# EAGLE board 00A-80-A1-01 (EAGLE 6.3), part 1 of 2
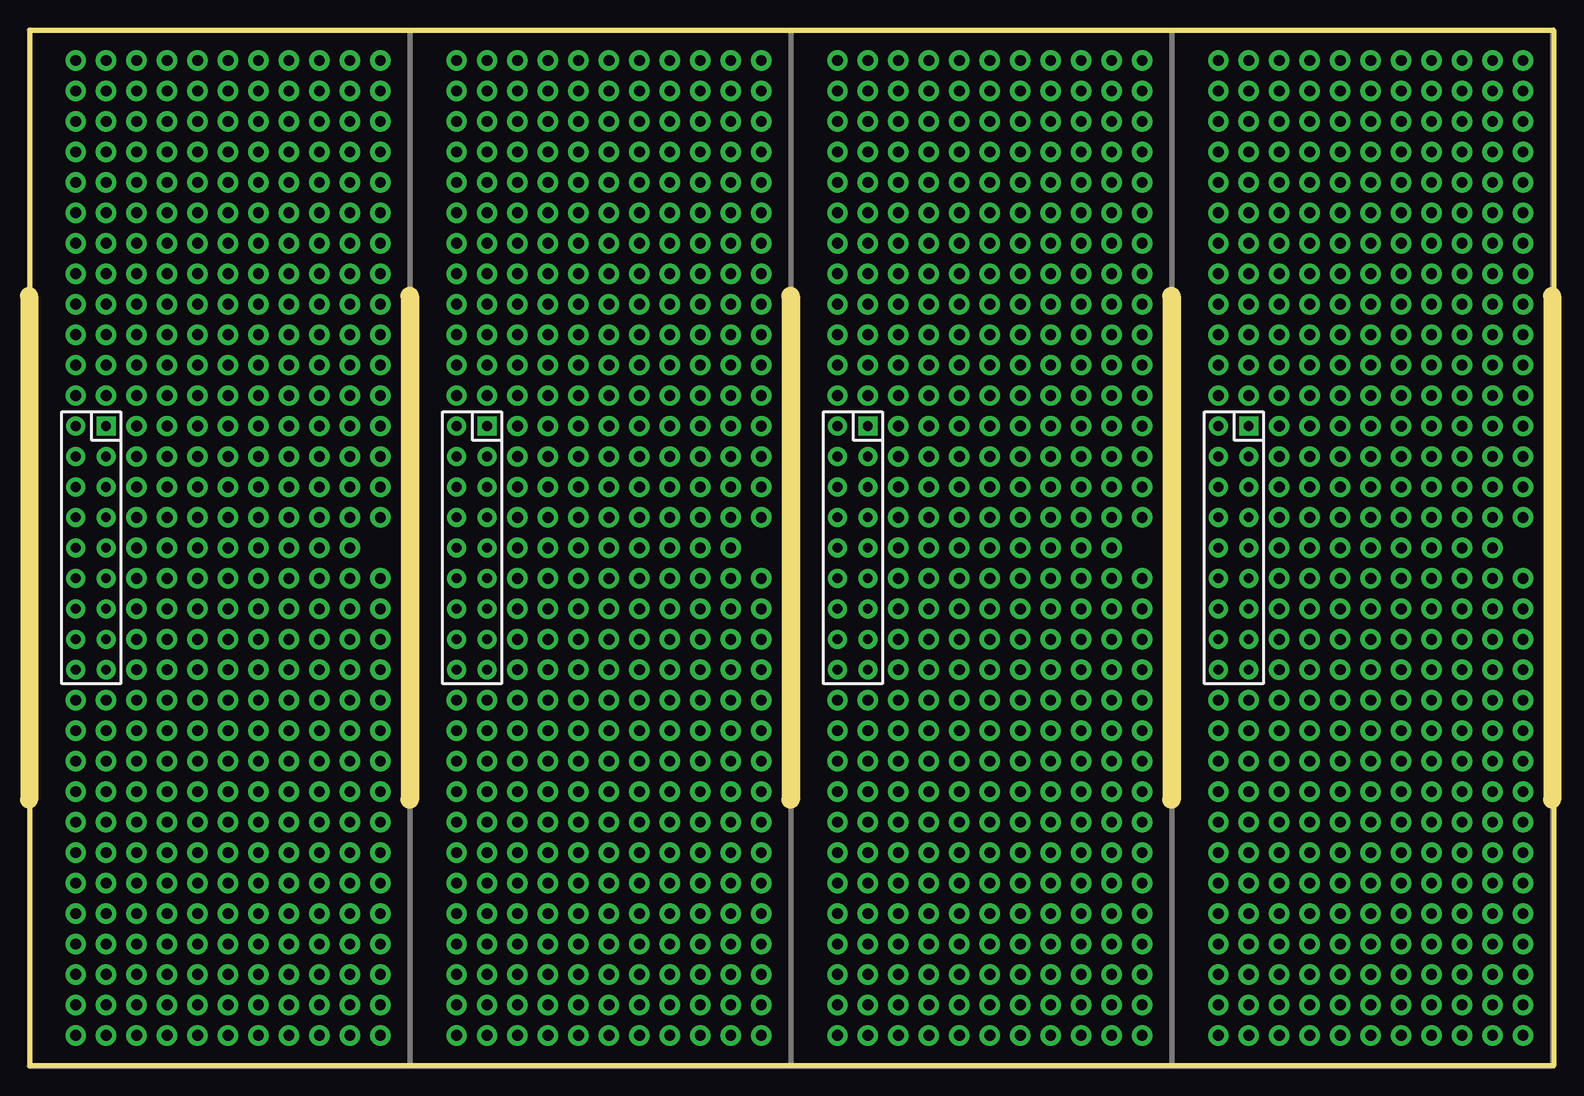
[diagram p0: board, top side]

Size 127 x 86.36 mm. Coordinates in mm from the lower left corner, seen from the top.
Outline: 0,86.36 127,86.36 127,0 0,0 0,86.36
Copper layers (1*16): Top 0.035mm / dielectric 1.5mm / Bottom 0.035mm
Design rules "minipcb-THD": minimum track width 0.5mm, minimum drill 0.5mm, track to track 0.5mm, track to pad 0.5mm, pad to pad 0.5mm, via to via 0.5mm, smd to smd 0mil, copper to edge 1mm, drill to drill 1mm, minimum pad ring 0.4mm, minimum via ring 0.4mm, stop-mask expansion 0.1mm, vias tented up to drill 0.6mm, thermal gap 0.5mm

## Footprints (pad centres in the part's own frame; a part is rotated, then mirrored left to right if it is on the bottom)
BC_HOUSING_35MM = drill 0.8 square: 1 6.42,10.16 | drill 0.8: 2 3.88,10.16; 3 6.42,7.62; 4 3.88,7.62; 5 6.42,5.08; 6 3.88,5.08; 7 6.42,2.54; 8 3.88,2.54; 9 6.42,0; 10 3.88,0; 11 6.42,-2.54; 12 3.88,-2.54; 13 6.42,-5.08; 14 3.88,-5.08; 15A 6.42,-7.62; 15B 3.88,-7.62; 16A 6.42,-10.16; 16B 3.88,-10.16

## Placement (x,y rotation side)
E$1  [IMAGE_GERBER_FRAME]  -44.45,-60.96 0 top  (outside the outline)
J1  [BC_HOUSING_35MM]  -0.07,43.18 0 top
J2  [BC_HOUSING_35MM]  31.68,43.18 0 top
J3  [BC_HOUSING_35MM]  63.43,43.18 0 top
J4  [BC_HOUSING_35MM]  95.18,43.18 0 top

## Library data of the parts
E$1 = miniPCB_ENGDWG; DWG_NO: 00A-80; REV: A1-01
J1-J4 = miniPCB_BOARDS

## Tracks (layer width: path | path; a pad name or v marks a point on that pad's centre or on a via)
N$1  (via drill 0.9)
  other vias: 3.81,60.96
N$2  (via drill 0.9)
  other vias: 3.81,58.42
N$3  (via drill 0.9)
  other vias: 6.35,58.42
N$4  (via drill 0.9)
  other vias: 6.35,60.96
N$5  (via drill 0.9)
  other vias: 8.89,60.96
N$6  (via drill 0.9)
  other vias: 8.89,58.42
N$7  (via drill 0.9)
  other vias: 3.81,55.88
N$8  (via drill 0.9)
  other vias: 6.35,55.88
N$9  (via drill 0.9)
  other vias: 8.89,55.88
N$10  (via drill 0.9)
  other vias: 8.89,53.34
N$11  (via drill 0.9)
  other vias: 8.89,50.8
N$12  (via drill 0.9)
  other vias: 8.89,48.26
N$13  (via drill 0.9)
  other vias: 8.89,45.72
N$14  (via drill 0.9)
  other vias: 8.89,43.18
N$15  (via drill 0.9)
  other vias: 8.89,40.64
N$16  (via drill 0.9)
  other vias: 8.89,38.1
N$17  (via drill 0.9)
  other vias: 8.89,35.56
N$18  (via drill 0.9)
  other vias: 8.89,33.02
N$19  (via drill 0.9)
  other vias: 8.89,30.48
N$20  (via drill 0.9)
  other vias: 6.35,30.48
N$21  (via drill 0.9)
  other vias: 3.81,30.48
N$22  (via drill 0.9)
  other vias: 3.81,27.94
N$23  (via drill 0.9)
  other vias: 6.35,27.94
N$24  (via drill 0.9)
  other vias: 8.89,27.94
N$25  (via drill 0.9)
  other vias: 3.81,25.4
N$26  (via drill 0.9)
  other vias: 6.35,25.4
N$27  (via drill 0.9)
  other vias: 8.89,25.4
N$28  (via drill 0.9)
  other vias: 8.89,22.86
N$29  (via drill 0.9)
  other vias: 6.35,22.86
N$30  (via drill 0.9)
  other vias: 3.81,22.86
N$31  (via drill 0.9)
  other vias: 11.43,22.86
N$32  (via drill 0.9)
  other vias: 11.43,25.4
N$33  (via drill 0.9)
  other vias: 11.43,27.94
N$34  (via drill 0.9)
  other vias: 11.43,30.48
N$35  (via drill 0.9)
  other vias: 11.43,33.02
N$36  (via drill 0.9)
  other vias: 11.43,35.56
N$37  (via drill 0.9)
  other vias: 11.43,38.1
N$38  (via drill 0.9)
  other vias: 11.43,40.64
N$39  (via drill 0.9)
  other vias: 11.43,43.18
N$40  (via drill 0.9)
  other vias: 11.43,45.72
N$41  (via drill 0.9)
  other vias: 11.43,48.26
N$42  (via drill 0.9)
  other vias: 11.43,50.8
N$43  (via drill 0.9)
  other vias: 11.43,53.34
N$44  (via drill 0.9)
  other vias: 11.43,55.88
N$45  (via drill 0.9)
  other vias: 11.43,58.42
N$46  (via drill 0.9)
  other vias: 11.43,60.96
N$47  (via drill 0.9)
  other vias: 11.43,63.5
N$48  (via drill 0.9)
  other vias: 8.89,63.5
N$49  (via drill 0.9)
  other vias: 6.35,63.5
N$50  (via drill 0.9)
  other vias: 3.81,63.5
N$51  (via drill 0.9)
  other vias: 13.97,60.96
N$52  (via drill 0.9)
  other vias: 13.97,58.42
N$53  (via drill 0.9)
  other vias: 13.97,55.88
N$54  (via drill 0.9)
  other vias: 13.97,53.34
N$55  (via drill 0.9)
  other vias: 13.97,50.8
N$56  (via drill 0.9)
  other vias: 13.97,48.26
N$57  (via drill 0.9)
  other vias: 13.97,45.72
N$58  (via drill 0.9)
  other vias: 13.97,43.18
N$59  (via drill 0.9)
  other vias: 13.97,40.64
N$60  (via drill 0.9)
  other vias: 13.97,38.1
N$61  (via drill 0.9)
  other vias: 13.97,35.56
N$62  (via drill 0.9)
  other vias: 13.97,33.02
N$63  (via drill 0.9)
  other vias: 13.97,30.48
N$64  (via drill 0.9)
  other vias: 13.97,27.94
N$65  (via drill 0.9)
  other vias: 13.97,25.4
N$66  (via drill 0.9)
  other vias: 13.97,22.86
N$67  (via drill 0.9)
  other vias: 16.51,22.86
N$68  (via drill 0.9)
  other vias: 16.51,25.4
N$69  (via drill 0.9)
  other vias: 16.51,27.94
N$70  (via drill 0.9)
  other vias: 16.51,30.48
N$71  (via drill 0.9)
  other vias: 16.51,33.02
N$72  (via drill 0.9)
  other vias: 16.51,35.56
N$73  (via drill 0.9)
  other vias: 16.51,38.1
N$74  (via drill 0.9)
  other vias: 16.51,40.64
N$75  (via drill 0.9)
  other vias: 16.51,43.18
N$76  (via drill 0.9)
  other vias: 16.51,45.72
N$77  (via drill 0.9)
  other vias: 16.51,48.26
N$78  (via drill 0.9)
  other vias: 16.51,50.8
N$79  (via drill 0.9)
  other vias: 16.51,53.34
N$80  (via drill 0.9)
  other vias: 16.51,55.88
N$81  (via drill 0.9)
  other vias: 16.51,58.42
N$82  (via drill 0.9)
  other vias: 16.51,60.96
N$83  (via drill 0.9)
  other vias: 16.51,63.5
N$84  (via drill 0.9)
  other vias: 13.97,63.5
N$85  (via drill 0.9)
  other vias: 19.05,60.96
N$86  (via drill 0.9)
  other vias: 19.05,58.42
N$87  (via drill 0.9)
  other vias: 19.05,55.88
N$88  (via drill 0.9)
  other vias: 19.05,53.34
N$89  (via drill 0.9)
  other vias: 19.05,50.8
N$90  (via drill 0.9)
  other vias: 19.05,48.26
N$91  (via drill 0.9)
  other vias: 19.05,45.72
N$92  (via drill 0.9)
  other vias: 19.05,43.18
N$93  (via drill 0.9)
  other vias: 19.05,40.64
N$94  (via drill 0.9)
  other vias: 19.05,38.1
N$95  (via drill 0.9)
  other vias: 19.05,35.56
N$96  (via drill 0.9)
  other vias: 19.05,33.02
N$97  (via drill 0.9)
  other vias: 19.05,30.48
N$98  (via drill 0.9)
  other vias: 19.05,27.94
N$99  (via drill 0.9)
  other vias: 19.05,25.4
N$100  (via drill 0.9)
  other vias: 19.05,22.86
N$101  (via drill 0.9)
  other vias: 21.59,22.86
N$102  (via drill 0.9)
  other vias: 21.59,25.4
N$103  (via drill 0.9)
  other vias: 21.59,27.94
N$104  (via drill 0.9)
  other vias: 21.59,30.48
N$105  (via drill 0.9)
  other vias: 21.59,33.02
N$106  (via drill 0.9)
  other vias: 21.59,35.56
N$107  (via drill 0.9)
  other vias: 21.59,38.1
N$108  (via drill 0.9)
  other vias: 21.59,40.64
N$109  (via drill 0.9)
  other vias: 21.59,43.18
N$110  (via drill 0.9)
  other vias: 21.59,45.72
N$111  (via drill 0.9)
  other vias: 21.59,48.26
N$112  (via drill 0.9)
  other vias: 21.59,50.8
N$113  (via drill 0.9)
  other vias: 21.59,53.34
N$114  (via drill 0.9)
  other vias: 21.59,55.88
N$115  (via drill 0.9)
  other vias: 21.59,58.42
N$116  (via drill 0.9)
  other vias: 21.59,60.96
N$117  (via drill 0.9)
  other vias: 21.59,63.5
N$118  (via drill 0.9)
  other vias: 19.05,63.5
N$119  (via drill 0.9)
  other vias: 24.13,60.96
N$120  (via drill 0.9)
  other vias: 24.13,58.42
N$121  (via drill 0.9)
  other vias: 24.13,55.88
N$122  (via drill 0.9)
  other vias: 24.13,53.34
N$123  (via drill 0.9)
  other vias: 24.13,50.8
N$124  (via drill 0.9)
  other vias: 24.13,48.26
N$125  (via drill 0.9)
  other vias: 24.13,45.72
N$126  (via drill 0.9)
  other vias: 24.13,43.18
N$127  (via drill 0.9)
  other vias: 24.13,40.64
N$128  (via drill 0.9)
  other vias: 24.13,38.1
N$129  (via drill 0.9)
  other vias: 24.13,35.56
N$130  (via drill 0.9)
  other vias: 24.13,33.02
N$131  (via drill 0.9)
  other vias: 24.13,30.48
N$132  (via drill 0.9)
  other vias: 24.13,27.94
N$133  (via drill 0.9)
  other vias: 24.13,25.4
N$134  (via drill 0.9)
  other vias: 24.13,22.86
N$135  (via drill 0.9)
  other vias: 26.67,22.86
N$136  (via drill 0.9)
  other vias: 26.67,25.4
N$137  (via drill 0.9)
  other vias: 26.67,27.94
N$138  (via drill 0.9)
  other vias: 26.67,30.48
N$139  (via drill 0.9)
  other vias: 26.67,33.02
N$140  (via drill 0.9)
  other vias: 26.67,35.56
N$141  (via drill 0.9)
  other vias: 26.67,38.1
N$142  (via drill 0.9)
  other vias: 26.67,40.64
N$143  (via drill 0.9)
  other vias: 26.67,43.18
N$144  (via drill 0.9)
  other vias: 26.67,45.72
N$145  (via drill 0.9)
  other vias: 26.67,48.26
N$146  (via drill 0.9)
  other vias: 26.67,50.8
N$147  (via drill 0.9)
  other vias: 26.67,53.34
N$148  (via drill 0.9)
  other vias: 26.67,55.88
N$149  (via drill 0.9)
  other vias: 26.67,58.42
N$150  (via drill 0.9)
  other vias: 26.67,60.96
N$151  (via drill 0.9)
  other vias: 26.67,63.5
N$152  (via drill 0.9)
  other vias: 24.13,63.5
N$153  (via drill 0.9)
  other vias: 29.21,22.86
N$154  (via drill 0.9)
  other vias: 29.21,25.4
N$155  (via drill 0.9)
  other vias: 29.21,27.94
N$156  (via drill 0.9)
  other vias: 29.21,30.48
N$157  (via drill 0.9)
  other vias: 29.21,33.02
N$158  (via drill 0.9)
  other vias: 29.21,35.56
N$159  (via drill 0.9)
  other vias: 29.21,38.1
N$160  (via drill 0.9)
  other vias: 29.21,40.64
N$161  (via drill 0.9)
  other vias: 3.81,71.12
N$162  (via drill 0.9)
  other vias: 29.21,45.72
N$163  (via drill 0.9)
  other vias: 29.21,48.26
N$164  (via drill 0.9)
  other vias: 29.21,50.8
N$165  (via drill 0.9)
  other vias: 29.21,53.34
N$166  (via drill 0.9)
  other vias: 29.21,55.88
N$167  (via drill 0.9)
  other vias: 29.21,58.42
N$168  (via drill 0.9)
  other vias: 29.21,60.96
N$169  (via drill 0.9)
  other vias: 29.21,63.5
N$170  (via drill 0.9)
  other vias: 3.81,68.58
N$171  (via drill 0.9)
  other vias: 6.35,68.58
N$172  (via drill 0.9)
  other vias: 6.35,71.12
N$173  (via drill 0.9)
  other vias: 8.89,71.12
N$174  (via drill 0.9)
  other vias: 8.89,68.58
N$175  (via drill 0.9)
  other vias: 3.81,66.04
N$176  (via drill 0.9)
  other vias: 6.35,66.04
N$177  (via drill 0.9)
  other vias: 8.89,66.04
N$178  (via drill 0.9)
  other vias: 11.43,66.04
N$179  (via drill 0.9)
  other vias: 11.43,68.58
N$180  (via drill 0.9)
  other vias: 11.43,71.12
N$181  (via drill 0.9)
  other vias: 11.43,73.66
N$182  (via drill 0.9)
  other vias: 8.89,73.66
N$183  (via drill 0.9)
  other vias: 6.35,73.66
N$184  (via drill 0.9)
  other vias: 3.81,73.66
N$185  (via drill 0.9)
  other vias: 13.97,71.12
N$186  (via drill 0.9)
  other vias: 13.97,68.58
N$187  (via drill 0.9)
  other vias: 13.97,66.04
N$188  (via drill 0.9)
  other vias: 16.51,66.04
N$189  (via drill 0.9)
  other vias: 16.51,68.58
N$190  (via drill 0.9)
  other vias: 16.51,71.12
N$191  (via drill 0.9)
  other vias: 16.51,73.66
N$192  (via drill 0.9)
  other vias: 13.97,73.66
N$193  (via drill 0.9)
  other vias: 19.05,71.12
N$194  (via drill 0.9)
  other vias: 19.05,68.58
N$195  (via drill 0.9)
  other vias: 19.05,66.04
N$196  (via drill 0.9)
  other vias: 21.59,66.04
N$197  (via drill 0.9)
  other vias: 21.59,68.58
N$198  (via drill 0.9)
  other vias: 21.59,71.12
N$199  (via drill 0.9)
  other vias: 21.59,73.66
N$200  (via drill 0.9)
  other vias: 19.05,73.66
N$201  (via drill 0.9)
  other vias: 24.13,71.12
N$202  (via drill 0.9)
  other vias: 24.13,68.58
N$203  (via drill 0.9)
  other vias: 24.13,66.04
N$204  (via drill 0.9)
  other vias: 26.67,66.04
N$205  (via drill 0.9)
  other vias: 26.67,68.58
N$206  (via drill 0.9)
  other vias: 26.67,71.12
N$207  (via drill 0.9)
  other vias: 26.67,73.66
N$208  (via drill 0.9)
  other vias: 24.13,73.66
N$209  (via drill 0.9)
  other vias: 29.21,66.04
N$210  (via drill 0.9)
  other vias: 29.21,68.58
N$211  (via drill 0.9)
  other vias: 29.21,71.12
N$212  (via drill 0.9)
  other vias: 29.21,73.66
N$213  (via drill 0.9)
  other vias: 3.81,17.78
N$214  (via drill 0.9)
  other vias: 3.81,15.24
N$215  (via drill 0.9)
  other vias: 6.35,15.24
N$216  (via drill 0.9)
  other vias: 6.35,17.78
N$217  (via drill 0.9)
  other vias: 8.89,17.78
N$218  (via drill 0.9)
  other vias: 8.89,15.24
N$219  (via drill 0.9)
  other vias: 3.81,12.7
N$220  (via drill 0.9)
  other vias: 6.35,12.7
N$221  (via drill 0.9)
  other vias: 8.89,12.7
N$222  (via drill 0.9)
  other vias: 11.43,12.7
N$223  (via drill 0.9)
  other vias: 11.43,15.24
N$224  (via drill 0.9)
  other vias: 11.43,17.78
N$225  (via drill 0.9)
  other vias: 11.43,20.32
N$226  (via drill 0.9)
  other vias: 8.89,20.32
N$227  (via drill 0.9)
  other vias: 6.35,20.32
N$228  (via drill 0.9)
  other vias: 3.81,20.32
N$229  (via drill 0.9)
  other vias: 13.97,17.78
N$230  (via drill 0.9)
  other vias: 13.97,15.24
N$231  (via drill 0.9)
  other vias: 13.97,12.7
N$232  (via drill 0.9)
  other vias: 16.51,12.7
N$233  (via drill 0.9)
  other vias: 16.51,15.24
N$234  (via drill 0.9)
  other vias: 16.51,17.78
N$235  (via drill 0.9)
  other vias: 16.51,20.32
N$236  (via drill 0.9)
  other vias: 13.97,20.32
N$237  (via drill 0.9)
  other vias: 19.05,17.78
N$238  (via drill 0.9)
  other vias: 19.05,15.24
N$239  (via drill 0.9)
  other vias: 19.05,12.7
N$240  (via drill 0.9)
  other vias: 21.59,12.7
N$241  (via drill 0.9)
  other vias: 21.59,15.24
N$242  (via drill 0.9)
  other vias: 21.59,17.78
N$243  (via drill 0.9)
  other vias: 21.59,20.32
N$244  (via drill 0.9)
  other vias: 19.05,20.32
N$245  (via drill 0.9)
  other vias: 24.13,17.78
N$246  (via drill 0.9)
  other vias: 24.13,15.24
N$247  (via drill 0.9)
  other vias: 24.13,12.7
N$248  (via drill 0.9)
  other vias: 26.67,12.7
N$249  (via drill 0.9)
  other vias: 26.67,15.24
N$250  (via drill 0.9)
  other vias: 26.67,17.78
N$251  (via drill 0.9)
  other vias: 26.67,20.32
N$252  (via drill 0.9)
  other vias: 24.13,20.32
N$253  (via drill 0.9)
  other vias: 29.21,12.7
N$254  (via drill 0.9)
  other vias: 29.21,15.24
N$255  (via drill 0.9)
  other vias: 29.21,17.78
N$256  (via drill 0.9)
  other vias: 29.21,20.32
N$257  (via drill 0.9)
  other vias: 3.81,7.62
N$258  (via drill 0.9)
  other vias: 3.81,5.08
N$259  (via drill 0.9)
  other vias: 6.35,5.08
N$260  (via drill 0.9)
  other vias: 6.35,7.62
N$261  (via drill 0.9)
  other vias: 8.89,7.62
N$262  (via drill 0.9)
  other vias: 8.89,5.08
N$263  (via drill 0.9)
  other vias: 3.81,2.54
N$264  (via drill 0.9)
  other vias: 6.35,2.54
N$265  (via drill 0.9)
  other vias: 8.89,2.54
N$266  (via drill 0.9)
  other vias: 11.43,2.54
N$267  (via drill 0.9)
  other vias: 11.43,5.08
N$268  (via drill 0.9)
  other vias: 11.43,7.62
N$269  (via drill 0.9)
  other vias: 11.43,10.16
N$270  (via drill 0.9)
  other vias: 8.89,10.16
N$271  (via drill 0.9)
  other vias: 6.35,10.16
N$272  (via drill 0.9)
  other vias: 3.81,10.16
N$273  (via drill 0.9)
  other vias: 13.97,7.62
N$274  (via drill 0.9)
  other vias: 13.97,5.08
N$275  (via drill 0.9)
  other vias: 13.97,2.54
N$276  (via drill 0.9)
  other vias: 16.51,2.54
N$277  (via drill 0.9)
  other vias: 16.51,5.08
N$278  (via drill 0.9)
  other vias: 16.51,7.62
N$279  (via drill 0.9)
  other vias: 16.51,10.16
N$280  (via drill 0.9)
  other vias: 13.97,10.16
N$281  (via drill 0.9)
  other vias: 19.05,7.62
N$282  (via drill 0.9)
  other vias: 19.05,5.08
N$283  (via drill 0.9)
  other vias: 19.05,2.54
N$284  (via drill 0.9)
  other vias: 21.59,2.54
N$285  (via drill 0.9)
  other vias: 21.59,5.08
N$286  (via drill 0.9)
  other vias: 21.59,7.62
N$287  (via drill 0.9)
  other vias: 21.59,10.16
N$288  (via drill 0.9)
  other vias: 19.05,10.16
N$289  (via drill 0.9)
  other vias: 24.13,7.62
N$290  (via drill 0.9)
  other vias: 24.13,5.08
N$291  (via drill 0.9)
  other vias: 24.13,2.54
N$292  (via drill 0.9)
  other vias: 26.67,2.54
N$293  (via drill 0.9)
  other vias: 26.67,5.08
N$294  (via drill 0.9)
  other vias: 26.67,7.62
N$295  (via drill 0.9)
  other vias: 26.67,10.16
N$296  (via drill 0.9)
  other vias: 24.13,10.16
N$297  (via drill 0.9)
  other vias: 29.21,2.54
N$298  (via drill 0.9)
  other vias: 29.21,5.08
N$299  (via drill 0.9)
  other vias: 29.21,7.62
N$300  (via drill 0.9)
  other vias: 29.21,10.16
N$301  (via drill 0.9)
  other vias: 3.81,81.28
N$302  (via drill 0.9)
  other vias: 3.81,78.74
N$303  (via drill 0.9)
  other vias: 6.35,78.74
N$304  (via drill 0.9)
  other vias: 6.35,81.28
N$305  (via drill 0.9)
  other vias: 8.89,81.28
N$306  (via drill 0.9)
  other vias: 8.89,78.74
N$307  (via drill 0.9)
  other vias: 3.81,76.2
N$308  (via drill 0.9)
  other vias: 6.35,76.2
N$309  (via drill 0.9)
  other vias: 8.89,76.2
N$310  (via drill 0.9)
  other vias: 11.43,76.2
N$311  (via drill 0.9)
  other vias: 11.43,78.74
N$312  (via drill 0.9)
  other vias: 11.43,81.28
N$313  (via drill 0.9)
  other vias: 11.43,83.82
N$314  (via drill 0.9)
  other vias: 8.89,83.82
N$315  (via drill 0.9)
  other vias: 6.35,83.82
N$316  (via drill 0.9)
  other vias: 3.81,83.82
N$317  (via drill 0.9)
  other vias: 13.97,81.28
N$318  (via drill 0.9)
  other vias: 13.97,78.74
N$319  (via drill 0.9)
  other vias: 13.97,76.2
N$320  (via drill 0.9)
  other vias: 16.51,76.2
N$321  (via drill 0.9)
  other vias: 16.51,78.74
N$322  (via drill 0.9)
  other vias: 16.51,81.28
N$323  (via drill 0.9)
  other vias: 16.51,83.82
N$324  (via drill 0.9)
  other vias: 13.97,83.82
N$325  (via drill 0.9)
  other vias: 19.05,81.28
N$326  (via drill 0.9)
  other vias: 19.05,78.74
N$327  (via drill 0.9)
  other vias: 19.05,76.2
N$328  (via drill 0.9)
  other vias: 21.59,76.2
N$329  (via drill 0.9)
  other vias: 21.59,78.74
N$330  (via drill 0.9)
  other vias: 21.59,81.28
N$331  (via drill 0.9)
  other vias: 21.59,83.82
N$332  (via drill 0.9)
  other vias: 19.05,83.82
N$333  (via drill 0.9)
  other vias: 24.13,81.28
N$334  (via drill 0.9)
  other vias: 24.13,78.74
N$335  (via drill 0.9)
  other vias: 24.13,76.2
N$336  (via drill 0.9)
  other vias: 26.67,76.2
N$337  (via drill 0.9)
  other vias: 26.67,78.74
N$338  (via drill 0.9)
  other vias: 26.67,81.28
N$339  (via drill 0.9)
  other vias: 26.67,83.82
N$340  (via drill 0.9)
  other vias: 24.13,83.82
N$341  (via drill 0.9)
  other vias: 29.21,76.2
N$342  (via drill 0.9)
  other vias: 29.21,78.74
N$343  (via drill 0.9)
  other vias: 29.21,81.28
N$344  (via drill 0.9)
  other vias: 29.21,83.82
N$345  (via drill 0.9)
  other vias: 35.56,60.96
N$346  (via drill 0.9)
  other vias: 35.56,58.42
N$347  (via drill 0.9)
  other vias: 38.1,58.42
N$348  (via drill 0.9)
  other vias: 38.1,60.96
N$349  (via drill 0.9)
  other vias: 40.64,60.96
N$350  (via drill 0.9)
  other vias: 40.64,58.42
N$351  (via drill 0.9)
  other vias: 35.56,55.88
N$352  (via drill 0.9)
  other vias: 38.1,55.88
N$353  (via drill 0.9)
  other vias: 40.64,55.88
N$354  (via drill 0.9)
  other vias: 40.64,53.34
N$355  (via drill 0.9)
  other vias: 40.64,50.8
N$356  (via drill 0.9)
  other vias: 40.64,48.26
N$357  (via drill 0.9)
  other vias: 40.64,45.72
N$358  (via drill 0.9)
  other vias: 40.64,43.18
N$359  (via drill 0.9)
  other vias: 40.64,40.64
N$360  (via drill 0.9)
  other vias: 40.64,38.1
N$361  (via drill 0.9)
  other vias: 40.64,35.56
N$362  (via drill 0.9)
  other vias: 40.64,33.02
N$363  (via drill 0.9)
  other vias: 40.64,30.48
N$364  (via drill 0.9)
  other vias: 38.1,30.48
N$365  (via drill 0.9)
  other vias: 35.56,30.48
N$366  (via drill 0.9)
  other vias: 35.56,27.94
N$367  (via drill 0.9)
  other vias: 38.1,27.94
N$368  (via drill 0.9)
  other vias: 40.64,27.94
N$369  (via drill 0.9)
  other vias: 35.56,25.4
N$370  (via drill 0.9)
  other vias: 38.1,25.4
N$371  (via drill 0.9)
  other vias: 40.64,25.4
N$372  (via drill 0.9)
  other vias: 40.64,22.86
N$373  (via drill 0.9)
  other vias: 38.1,22.86
N$374  (via drill 0.9)
  other vias: 35.56,22.86
N$375  (via drill 0.9)
  other vias: 43.18,22.86
N$376  (via drill 0.9)
  other vias: 43.18,25.4
N$377  (via drill 0.9)
  other vias: 43.18,27.94
N$378  (via drill 0.9)
  other vias: 43.18,30.48
N$379  (via drill 0.9)
  other vias: 43.18,33.02
N$380  (via drill 0.9)
  other vias: 43.18,35.56
N$381  (via drill 0.9)
  other vias: 43.18,38.1
N$382  (via drill 0.9)
  other vias: 43.18,40.64
N$383  (via drill 0.9)
  other vias: 43.18,43.18
N$384  (via drill 0.9)
  other vias: 43.18,45.72
N$385  (via drill 0.9)
  other vias: 43.18,48.26
N$386  (via drill 0.9)
  other vias: 43.18,50.8
N$387  (via drill 0.9)
  other vias: 43.18,53.34
N$388  (via drill 0.9)
  other vias: 43.18,55.88
N$389  (via drill 0.9)
  other vias: 43.18,58.42
N$390  (via drill 0.9)
  other vias: 43.18,60.96
N$391  (via drill 0.9)
  other vias: 43.18,63.5
N$392  (via drill 0.9)
  other vias: 40.64,63.5
N$393  (via drill 0.9)
  other vias: 38.1,63.5
N$394  (via drill 0.9)
  other vias: 35.56,63.5
N$395  (via drill 0.9)
  other vias: 45.72,60.96
N$396  (via drill 0.9)
  other vias: 45.72,58.42
N$397  (via drill 0.9)
  other vias: 45.72,55.88
N$398  (via drill 0.9)
  other vias: 45.72,53.34
N$399  (via drill 0.9)
  other vias: 45.72,50.8
N$400  (via drill 0.9)
  other vias: 45.72,48.26
N$401  (via drill 0.9)
  other vias: 45.72,45.72
N$402  (via drill 0.9)
  other vias: 45.72,43.18
N$403  (via drill 0.9)
  other vias: 45.72,40.64
N$404  (via drill 0.9)
  other vias: 45.72,38.1
N$405  (via drill 0.9)
  other vias: 45.72,35.56
N$406  (via drill 0.9)
  other vias: 45.72,33.02
N$407  (via drill 0.9)
  other vias: 45.72,30.48
N$408  (via drill 0.9)
  other vias: 45.72,27.94
N$409  (via drill 0.9)
  other vias: 45.72,25.4
N$410  (via drill 0.9)
  other vias: 45.72,22.86
N$411  (via drill 0.9)
  other vias: 48.26,22.86
N$412  (via drill 0.9)
  other vias: 48.26,25.4
N$413  (via drill 0.9)
  other vias: 48.26,27.94
N$414  (via drill 0.9)
  other vias: 48.26,30.48
N$415  (via drill 0.9)
  other vias: 48.26,33.02
N$416  (via drill 0.9)
  other vias: 48.26,35.56
N$417  (via drill 0.9)
  other vias: 48.26,38.1
N$418  (via drill 0.9)
  other vias: 48.26,40.64
N$419  (via drill 0.9)
  other vias: 48.26,43.18
N$420  (via drill 0.9)
  other vias: 48.26,45.72
N$421  (via drill 0.9)
  other vias: 48.26,48.26
N$422  (via drill 0.9)
  other vias: 48.26,50.8
N$423  (via drill 0.9)
  other vias: 48.26,53.34
N$424  (via drill 0.9)
  other vias: 48.26,55.88
N$425  (via drill 0.9)
  other vias: 48.26,58.42
N$426  (via drill 0.9)
  other vias: 48.26,60.96
N$427  (via drill 0.9)
  other vias: 48.26,63.5
N$428  (via drill 0.9)
  other vias: 45.72,63.5
N$429  (via drill 0.9)
  other vias: 50.8,60.96
N$430  (via drill 0.9)
  other vias: 50.8,58.42
N$431  (via drill 0.9)
  other vias: 50.8,55.88
N$432  (via drill 0.9)
  other vias: 50.8,53.34
N$433  (via drill 0.9)
  other vias: 50.8,50.8
N$434  (via drill 0.9)
  other vias: 50.8,48.26
N$435  (via drill 0.9)
  other vias: 50.8,45.72
N$436  (via drill 0.9)
  other vias: 50.8,43.18
N$437  (via drill 0.9)
  other vias: 50.8,40.64
N$438  (via drill 0.9)
  other vias: 50.8,38.1
N$439  (via drill 0.9)
  other vias: 50.8,35.56
N$440  (via drill 0.9)
  other vias: 50.8,33.02
N$441  (via drill 0.9)
  other vias: 50.8,30.48
N$442  (via drill 0.9)
  other vias: 50.8,27.94
N$443  (via drill 0.9)
  other vias: 50.8,25.4
N$444  (via drill 0.9)
  other vias: 50.8,22.86
N$445  (via drill 0.9)
  other vias: 53.34,22.86
N$446  (via drill 0.9)
  other vias: 53.34,25.4
N$447  (via drill 0.9)
  other vias: 53.34,27.94
N$448  (via drill 0.9)
  other vias: 53.34,30.48
N$449  (via drill 0.9)
  other vias: 53.34,33.02
N$450  (via drill 0.9)
  other vias: 53.34,35.56
N$451  (via drill 0.9)
  other vias: 53.34,38.1
N$452  (via drill 0.9)
  other vias: 53.34,40.64
N$453  (via drill 0.9)
  other vias: 53.34,43.18
N$454  (via drill 0.9)
  other vias: 53.34,45.72
N$455  (via drill 0.9)
  other vias: 53.34,48.26
N$456  (via drill 0.9)
  other vias: 53.34,50.8
N$457  (via drill 0.9)
  other vias: 53.34,53.34
N$458  (via drill 0.9)
  other vias: 53.34,55.88
N$459  (via drill 0.9)
  other vias: 53.34,58.42
N$460  (via drill 0.9)
  other vias: 53.34,60.96
N$461  (via drill 0.9)
  other vias: 53.34,63.5
N$462  (via drill 0.9)
  other vias: 50.8,63.5
N$463  (via drill 0.9)
  other vias: 55.88,60.96
N$464  (via drill 0.9)
  other vias: 55.88,58.42
N$465  (via drill 0.9)
  other vias: 55.88,55.88
N$466  (via drill 0.9)
  other vias: 55.88,53.34
N$467  (via drill 0.9)
  other vias: 55.88,50.8
N$468  (via drill 0.9)
  other vias: 55.88,48.26
N$469  (via drill 0.9)
  other vias: 55.88,45.72
N$470  (via drill 0.9)
  other vias: 55.88,43.18
N$471  (via drill 0.9)
  other vias: 55.88,40.64
N$472  (via drill 0.9)
  other vias: 55.88,38.1
N$473  (via drill 0.9)
  other vias: 55.88,35.56
N$474  (via drill 0.9)
  other vias: 55.88,33.02
N$475  (via drill 0.9)
  other vias: 55.88,30.48
N$476  (via drill 0.9)
  other vias: 55.88,27.94
N$477  (via drill 0.9)
  other vias: 55.88,25.4
N$478  (via drill 0.9)
  other vias: 55.88,22.86
N$479  (via drill 0.9)
  other vias: 58.42,22.86
N$480  (via drill 0.9)
  other vias: 58.42,25.4
N$481  (via drill 0.9)
  other vias: 58.42,27.94
N$482  (via drill 0.9)
  other vias: 58.42,30.48
N$483  (via drill 0.9)
  other vias: 58.42,33.02
N$484  (via drill 0.9)
  other vias: 58.42,35.56
N$485  (via drill 0.9)
  other vias: 58.42,38.1
N$486  (via drill 0.9)
  other vias: 58.42,40.64
N$487  (via drill 0.9)
  other vias: 58.42,43.18
N$488  (via drill 0.9)
  other vias: 58.42,45.72
N$489  (via drill 0.9)
  other vias: 58.42,48.26
N$490  (via drill 0.9)
  other vias: 58.42,50.8
N$491  (via drill 0.9)
  other vias: 58.42,53.34
N$492  (via drill 0.9)
  other vias: 58.42,55.88
N$493  (via drill 0.9)
  other vias: 58.42,58.42
N$494  (via drill 0.9)
  other vias: 58.42,60.96
N$495  (via drill 0.9)
  other vias: 58.42,63.5
N$496  (via drill 0.9)
  other vias: 55.88,63.5
N$497  (via drill 0.9)
  other vias: 60.96,22.86
N$498  (via drill 0.9)
  other vias: 60.96,25.4
N$499  (via drill 0.9)
  other vias: 60.96,27.94
N$500  (via drill 0.9)
  other vias: 60.96,30.48
N$501  (via drill 0.9)
  other vias: 60.96,33.02
N$502  (via drill 0.9)
  other vias: 60.96,35.56
N$503  (via drill 0.9)
  other vias: 60.96,38.1
N$504  (via drill 0.9)
  other vias: 60.96,40.64
N$505  (via drill 0.9)
  other vias: 60.96,45.72
N$506  (via drill 0.9)
  other vias: 60.96,48.26
N$507  (via drill 0.9)
  other vias: 60.96,50.8
N$508  (via drill 0.9)
  other vias: 60.96,53.34
N$509  (via drill 0.9)
  other vias: 60.96,55.88
N$510  (via drill 0.9)
  other vias: 60.96,58.42
N$511  (via drill 0.9)
  other vias: 60.96,60.96
N$512  (via drill 0.9)
  other vias: 60.96,63.5
N$513  (via drill 0.9)
  other vias: 35.56,71.12
N$514  (via drill 0.9)
  other vias: 35.56,68.58
N$515  (via drill 0.9)
  other vias: 38.1,68.58
N$516  (via drill 0.9)
  other vias: 38.1,71.12
N$517  (via drill 0.9)
  other vias: 40.64,71.12
N$518  (via drill 0.9)
  other vias: 40.64,68.58
N$519  (via drill 0.9)
  other vias: 35.56,66.04
N$520  (via drill 0.9)
  other vias: 38.1,66.04
N$521  (via drill 0.9)
  other vias: 40.64,66.04
N$522  (via drill 0.9)
  other vias: 43.18,66.04
N$523  (via drill 0.9)
  other vias: 43.18,68.58
N$524  (via drill 0.9)
  other vias: 43.18,71.12
N$525  (via drill 0.9)
  other vias: 43.18,73.66
N$526  (via drill 0.9)
  other vias: 40.64,73.66
N$527  (via drill 0.9)
  other vias: 38.1,73.66
N$528  (via drill 0.9)
  other vias: 35.56,73.66
N$529  (via drill 0.9)
  other vias: 45.72,71.12
N$530  (via drill 0.9)
  other vias: 45.72,68.58
N$531  (via drill 0.9)
  other vias: 45.72,66.04
N$532  (via drill 0.9)
  other vias: 48.26,66.04
N$533  (via drill 0.9)
  other vias: 48.26,68.58
N$534  (via drill 0.9)
  other vias: 48.26,71.12
N$535  (via drill 0.9)
  other vias: 48.26,73.66
N$536  (via drill 0.9)
  other vias: 45.72,73.66
N$537  (via drill 0.9)
  other vias: 50.8,71.12
N$538  (via drill 0.9)
  other vias: 50.8,68.58
N$539  (via drill 0.9)
  other vias: 50.8,66.04
N$540  (via drill 0.9)
  other vias: 53.34,66.04
N$541  (via drill 0.9)
  other vias: 53.34,68.58
N$542  (via drill 0.9)
  other vias: 53.34,71.12
N$543  (via drill 0.9)
  other vias: 53.34,73.66
N$544  (via drill 0.9)
  other vias: 50.8,73.66
N$545  (via drill 0.9)
  other vias: 55.88,71.12
N$546  (via drill 0.9)
  other vias: 55.88,68.58
N$547  (via drill 0.9)
  other vias: 55.88,66.04
N$548  (via drill 0.9)
  other vias: 58.42,66.04
N$549  (via drill 0.9)
  other vias: 58.42,68.58
N$550  (via drill 0.9)
  other vias: 58.42,71.12
N$551  (via drill 0.9)
  other vias: 58.42,73.66
N$552  (via drill 0.9)
  other vias: 55.88,73.66
N$553  (via drill 0.9)
  other vias: 60.96,66.04
N$554  (via drill 0.9)
  other vias: 60.96,68.58
N$555  (via drill 0.9)
  other vias: 60.96,71.12
N$556  (via drill 0.9)
  other vias: 60.96,73.66
N$557  (via drill 0.9)
  other vias: 35.56,17.78
N$558  (via drill 0.9)
  other vias: 35.56,15.24
N$559  (via drill 0.9)
  other vias: 38.1,15.24
N$560  (via drill 0.9)
  other vias: 38.1,17.78
N$561  (via drill 0.9)
  other vias: 40.64,17.78
N$562  (via drill 0.9)
  other vias: 40.64,15.24
N$563  (via drill 0.9)
  other vias: 35.56,12.7
N$564  (via drill 0.9)
  other vias: 38.1,12.7
N$565  (via drill 0.9)
  other vias: 40.64,12.7
N$566  (via drill 0.9)
  other vias: 43.18,12.7
N$567  (via drill 0.9)
  other vias: 43.18,15.24
N$568  (via drill 0.9)
  other vias: 43.18,17.78
N$569  (via drill 0.9)
  other vias: 43.18,20.32
N$570  (via drill 0.9)
  other vias: 40.64,20.32
N$571  (via drill 0.9)
  other vias: 38.1,20.32
N$572  (via drill 0.9)
  other vias: 35.56,20.32
N$573  (via drill 0.9)
  other vias: 45.72,17.78
N$574  (via drill 0.9)
  other vias: 45.72,15.24
N$575  (via drill 0.9)
  other vias: 45.72,12.7
N$576  (via drill 0.9)
  other vias: 48.26,12.7
N$577  (via drill 0.9)
  other vias: 48.26,15.24
N$578  (via drill 0.9)
  other vias: 48.26,17.78
N$579  (via drill 0.9)
  other vias: 48.26,20.32
N$580  (via drill 0.9)
  other vias: 45.72,20.32
N$581  (via drill 0.9)
  other vias: 50.8,17.78
N$582  (via drill 0.9)
  other vias: 50.8,15.24
N$583  (via drill 0.9)
  other vias: 50.8,12.7
N$584  (via drill 0.9)
  other vias: 53.34,12.7
N$585  (via drill 0.9)
  other vias: 53.34,15.24
N$586  (via drill 0.9)
  other vias: 53.34,17.78
N$587  (via drill 0.9)
  other vias: 53.34,20.32
N$588  (via drill 0.9)
  other vias: 50.8,20.32
N$589  (via drill 0.9)
  other vias: 55.88,17.78
N$590  (via drill 0.9)
  other vias: 55.88,15.24
N$591  (via drill 0.9)
  other vias: 55.88,12.7
N$592  (via drill 0.9)
  other vias: 58.42,12.7
N$593  (via drill 0.9)
  other vias: 58.42,15.24
N$594  (via drill 0.9)
  other vias: 58.42,17.78
N$595  (via drill 0.9)
  other vias: 58.42,20.32
N$596  (via drill 0.9)
  other vias: 55.88,20.32
N$597  (via drill 0.9)
  other vias: 60.96,12.7
N$598  (via drill 0.9)
  other vias: 60.96,15.24
N$599  (via drill 0.9)
  other vias: 60.96,17.78
N$600  (via drill 0.9)
  other vias: 60.96,20.32
N$601  (via drill 0.9)
  other vias: 35.56,7.62
N$602  (via drill 0.9)
  other vias: 35.56,5.08
N$603  (via drill 0.9)
  other vias: 38.1,5.08
N$604  (via drill 0.9)
  other vias: 38.1,7.62
N$605  (via drill 0.9)
  other vias: 40.64,7.62
N$606  (via drill 0.9)
  other vias: 40.64,5.08
N$607  (via drill 0.9)
  other vias: 35.56,2.54
N$608  (via drill 0.9)
  other vias: 38.1,2.54
N$609  (via drill 0.9)
  other vias: 40.64,2.54
N$610  (via drill 0.9)
  other vias: 43.18,2.54
N$611  (via drill 0.9)
  other vias: 43.18,5.08
N$612  (via drill 0.9)
  other vias: 43.18,7.62
N$613  (via drill 0.9)
  other vias: 43.18,10.16
N$614  (via drill 0.9)
  other vias: 40.64,10.16
N$615  (via drill 0.9)
  other vias: 38.1,10.16
N$616  (via drill 0.9)
  other vias: 35.56,10.16
N$617  (via drill 0.9)
  other vias: 45.72,7.62
N$618  (via drill 0.9)
  other vias: 45.72,5.08
N$619  (via drill 0.9)
  other vias: 45.72,2.54
N$620  (via drill 0.9)
  other vias: 48.26,2.54
N$621  (via drill 0.9)
  other vias: 48.26,5.08
N$622  (via drill 0.9)
  other vias: 48.26,7.62
N$623  (via drill 0.9)
  other vias: 48.26,10.16
N$624  (via drill 0.9)
  other vias: 45.72,10.16
N$625  (via drill 0.9)
  other vias: 50.8,7.62
N$626  (via drill 0.9)
  other vias: 50.8,5.08
N$627  (via drill 0.9)
  other vias: 50.8,2.54
N$628  (via drill 0.9)
  other vias: 53.34,2.54
N$629  (via drill 0.9)
  other vias: 53.34,5.08
N$630  (via drill 0.9)
  other vias: 53.34,7.62
N$631  (via drill 0.9)
  other vias: 53.34,10.16
N$632  (via drill 0.9)
  other vias: 50.8,10.16
N$633  (via drill 0.9)
  other vias: 55.88,7.62
N$634  (via drill 0.9)
  other vias: 55.88,5.08
N$635  (via drill 0.9)
  other vias: 55.88,2.54
N$636  (via drill 0.9)
  other vias: 58.42,2.54
N$637  (via drill 0.9)
  other vias: 58.42,5.08
N$638  (via drill 0.9)
  other vias: 58.42,7.62
N$639  (via drill 0.9)
  other vias: 58.42,10.16
N$640  (via drill 0.9)
  other vias: 55.88,10.16
N$641  (via drill 0.9)
  other vias: 60.96,2.54
N$642  (via drill 0.9)
  other vias: 60.96,5.08
N$643  (via drill 0.9)
  other vias: 60.96,7.62
N$644  (via drill 0.9)
  other vias: 60.96,10.16
N$645  (via drill 0.9)
  other vias: 35.56,81.28
N$646  (via drill 0.9)
  other vias: 35.56,78.74
N$647  (via drill 0.9)
  other vias: 38.1,78.74
N$648  (via drill 0.9)
  other vias: 38.1,81.28
N$649  (via drill 0.9)
  other vias: 40.64,81.28
N$650  (via drill 0.9)
  other vias: 40.64,78.74
N$651  (via drill 0.9)
  other vias: 35.56,76.2
N$652  (via drill 0.9)
  other vias: 38.1,76.2
N$653  (via drill 0.9)
  other vias: 40.64,76.2
N$654  (via drill 0.9)
  other vias: 43.18,76.2
N$655  (via drill 0.9)
  other vias: 43.18,78.74
N$656  (via drill 0.9)
  other vias: 43.18,81.28
N$657  (via drill 0.9)
  other vias: 43.18,83.82
N$658  (via drill 0.9)
  other vias: 40.64,83.82
N$659  (via drill 0.9)
  other vias: 38.1,83.82
N$660  (via drill 0.9)
  other vias: 35.56,83.82
N$661  (via drill 0.9)
  other vias: 45.72,81.28
N$662  (via drill 0.9)
  other vias: 45.72,78.74
N$663  (via drill 0.9)
  other vias: 45.72,76.2
N$664  (via drill 0.9)
  other vias: 48.26,76.2
N$665  (via drill 0.9)
  other vias: 48.26,78.74
N$666  (via drill 0.9)
  other vias: 48.26,81.28
N$667  (via drill 0.9)
  other vias: 48.26,83.82
N$668  (via drill 0.9)
  other vias: 45.72,83.82
N$669  (via drill 0.9)
  other vias: 50.8,81.28
N$670  (via drill 0.9)
  other vias: 50.8,78.74
N$671  (via drill 0.9)
  other vias: 50.8,76.2
N$672  (via drill 0.9)
  other vias: 53.34,76.2
N$673  (via drill 0.9)
  other vias: 53.34,78.74
N$674  (via drill 0.9)
  other vias: 53.34,81.28
N$675  (via drill 0.9)
  other vias: 53.34,83.82
N$676  (via drill 0.9)
  other vias: 50.8,83.82
N$677  (via drill 0.9)
  other vias: 55.88,81.28
N$678  (via drill 0.9)
  other vias: 55.88,78.74
N$679  (via drill 0.9)
  other vias: 55.88,76.2
N$680  (via drill 0.9)
  other vias: 58.42,76.2
N$681  (via drill 0.9)
  other vias: 58.42,78.74
N$682  (via drill 0.9)
  other vias: 58.42,81.28
N$683  (via drill 0.9)
  other vias: 58.42,83.82
N$684  (via drill 0.9)
  other vias: 55.88,83.82
N$685  (via drill 0.9)
  other vias: 60.96,76.2
N$686  (via drill 0.9)
  other vias: 60.96,78.74
N$687  (via drill 0.9)
  other vias: 60.96,81.28
N$688  (via drill 0.9)
  other vias: 60.96,83.82
N$689  (via drill 0.9)
  other vias: 67.31,60.96
N$690  (via drill 0.9)
  other vias: 67.31,58.42
N$691  (via drill 0.9)
  other vias: 69.85,58.42
N$692  (via drill 0.9)
  other vias: 69.85,60.96
N$693  (via drill 0.9)
  other vias: 72.39,60.96
N$694  (via drill 0.9)
  other vias: 72.39,58.42
N$695  (via drill 0.9)
  other vias: 67.31,55.88
N$696  (via drill 0.9)
  other vias: 69.85,55.88
N$697  (via drill 0.9)
  other vias: 72.39,55.88
N$698  (via drill 0.9)
  other vias: 72.39,53.34
N$699  (via drill 0.9)
  other vias: 72.39,50.8
N$700  (via drill 0.9)
  other vias: 72.39,48.26
N$701  (via drill 0.9)
  other vias: 72.39,45.72
N$702  (via drill 0.9)
  other vias: 72.39,43.18
N$703  (via drill 0.9)
  other vias: 72.39,40.64
N$704  (via drill 0.9)
  other vias: 72.39,38.1
N$705  (via drill 0.9)
  other vias: 72.39,35.56
N$706  (via drill 0.9)
  other vias: 72.39,33.02
N$707  (via drill 0.9)
  other vias: 72.39,30.48
N$708  (via drill 0.9)
  other vias: 69.85,30.48
N$709  (via drill 0.9)
  other vias: 67.31,30.48
N$710  (via drill 0.9)
  other vias: 67.31,27.94
N$711  (via drill 0.9)
  other vias: 69.85,27.94
N$712  (via drill 0.9)
  other vias: 72.39,27.94
N$713  (via drill 0.9)
  other vias: 67.31,25.4
N$714  (via drill 0.9)
  other vias: 69.85,25.4
N$715  (via drill 0.9)
  other vias: 72.39,25.4
N$716  (via drill 0.9)
  other vias: 72.39,22.86
N$717  (via drill 0.9)
  other vias: 69.85,22.86
N$718  (via drill 0.9)
  other vias: 67.31,22.86
N$719  (via drill 0.9)
  other vias: 74.93,22.86
N$720  (via drill 0.9)
  other vias: 74.93,25.4
N$721  (via drill 0.9)
  other vias: 74.93,27.94
N$722  (via drill 0.9)
  other vias: 74.93,30.48
N$723  (via drill 0.9)
  other vias: 74.93,33.02
N$724  (via drill 0.9)
  other vias: 74.93,35.56
N$725  (via drill 0.9)
  other vias: 74.93,38.1
N$726  (via drill 0.9)
  other vias: 74.93,40.64
N$727  (via drill 0.9)
  other vias: 74.93,43.18
N$728  (via drill 0.9)
  other vias: 74.93,45.72
N$729  (via drill 0.9)
  other vias: 74.93,48.26
N$730  (via drill 0.9)
  other vias: 74.93,50.8
N$731  (via drill 0.9)
  other vias: 74.93,53.34
N$732  (via drill 0.9)
  other vias: 74.93,55.88
N$733  (via drill 0.9)
  other vias: 74.93,58.42
N$734  (via drill 0.9)
  other vias: 74.93,60.96
N$735  (via drill 0.9)
  other vias: 74.93,63.5
N$736  (via drill 0.9)
  other vias: 72.39,63.5
N$737  (via drill 0.9)
  other vias: 69.85,63.5
N$738  (via drill 0.9)
  other vias: 67.31,63.5
N$739  (via drill 0.9)
  other vias: 77.47,60.96
N$740  (via drill 0.9)
  other vias: 77.47,58.42
N$741  (via drill 0.9)
  other vias: 77.47,55.88
N$742  (via drill 0.9)
  other vias: 77.47,53.34
N$743  (via drill 0.9)
  other vias: 77.47,50.8
N$744  (via drill 0.9)
  other vias: 77.47,48.26
N$745  (via drill 0.9)
  other vias: 77.47,45.72
N$746  (via drill 0.9)
  other vias: 77.47,43.18
N$747  (via drill 0.9)
  other vias: 77.47,40.64
N$748  (via drill 0.9)
  other vias: 77.47,38.1
N$749  (via drill 0.9)
  other vias: 77.47,35.56
N$750  (via drill 0.9)
  other vias: 77.47,33.02
N$751  (via drill 0.9)
  other vias: 77.47,30.48
N$752  (via drill 0.9)
  other vias: 77.47,27.94
N$753  (via drill 0.9)
  other vias: 77.47,25.4
N$754  (via drill 0.9)
  other vias: 77.47,22.86
N$755  (via drill 0.9)
  other vias: 80.01,22.86
N$756  (via drill 0.9)
  other vias: 80.01,25.4
N$757  (via drill 0.9)
  other vias: 80.01,27.94
N$758  (via drill 0.9)
  other vias: 80.01,30.48
N$759  (via drill 0.9)
  other vias: 80.01,33.02
N$760  (via drill 0.9)
  other vias: 80.01,35.56
N$761  (via drill 0.9)
  other vias: 80.01,38.1
N$762  (via drill 0.9)
  other vias: 80.01,40.64
N$763  (via drill 0.9)
  other vias: 80.01,43.18
N$764  (via drill 0.9)
  other vias: 80.01,45.72
N$765  (via drill 0.9)
  other vias: 80.01,48.26
N$766  (via drill 0.9)
  other vias: 80.01,50.8
N$767  (via drill 0.9)
  other vias: 80.01,53.34
N$768  (via drill 0.9)
  other vias: 80.01,55.88
N$769  (via drill 0.9)
  other vias: 80.01,58.42
N$770  (via drill 0.9)
  other vias: 80.01,60.96
N$771  (via drill 0.9)
  other vias: 80.01,63.5
N$772  (via drill 0.9)
  other vias: 77.47,63.5
N$773  (via drill 0.9)
  other vias: 82.55,60.96
N$774  (via drill 0.9)
  other vias: 82.55,58.42
N$775  (via drill 0.9)
  other vias: 82.55,55.88
N$776  (via drill 0.9)
  other vias: 82.55,53.34
N$777  (via drill 0.9)
  other vias: 82.55,50.8
N$778  (via drill 0.9)
  other vias: 82.55,48.26
N$779  (via drill 0.9)
  other vias: 82.55,45.72
N$780  (via drill 0.9)
  other vias: 82.55,43.18
N$781  (via drill 0.9)
  other vias: 82.55,40.64
N$782  (via drill 0.9)
  other vias: 82.55,38.1
N$783  (via drill 0.9)
  other vias: 82.55,35.56
N$784  (via drill 0.9)
  other vias: 82.55,33.02
N$785  (via drill 0.9)
  other vias: 82.55,30.48
N$786  (via drill 0.9)
  other vias: 82.55,27.94
N$787  (via drill 0.9)
  other vias: 82.55,25.4
N$788  (via drill 0.9)
  other vias: 82.55,22.86
N$789  (via drill 0.9)
  other vias: 85.09,22.86
N$790  (via drill 0.9)
  other vias: 85.09,25.4
N$791  (via drill 0.9)
  other vias: 85.09,27.94
N$792  (via drill 0.9)
  other vias: 85.09,30.48
N$793  (via drill 0.9)
  other vias: 85.09,33.02
N$794  (via drill 0.9)
  other vias: 85.09,35.56
N$795  (via drill 0.9)
  other vias: 85.09,38.1
N$796  (via drill 0.9)
  other vias: 85.09,40.64
N$797  (via drill 0.9)
  other vias: 85.09,43.18
N$798  (via drill 0.9)
  other vias: 85.09,45.72
N$799  (via drill 0.9)
  other vias: 85.09,48.26
N$800  (via drill 0.9)
  other vias: 85.09,50.8
N$801  (via drill 0.9)
  other vias: 85.09,53.34
N$802  (via drill 0.9)
  other vias: 85.09,55.88
N$803  (via drill 0.9)
  other vias: 85.09,58.42
N$804  (via drill 0.9)
  other vias: 85.09,60.96
N$805  (via drill 0.9)
  other vias: 85.09,63.5
N$806  (via drill 0.9)
  other vias: 82.55,63.5
N$807  (via drill 0.9)
  other vias: 87.63,60.96
N$808  (via drill 0.9)
  other vias: 87.63,58.42
N$809  (via drill 0.9)
  other vias: 87.63,55.88
N$810  (via drill 0.9)
  other vias: 87.63,53.34
N$811  (via drill 0.9)
  other vias: 87.63,50.8
N$812  (via drill 0.9)
  other vias: 87.63,48.26
N$813  (via drill 0.9)
  other vias: 87.63,45.72
N$814  (via drill 0.9)
  other vias: 87.63,43.18
N$815  (via drill 0.9)
  other vias: 87.63,40.64
N$816  (via drill 0.9)
  other vias: 87.63,38.1
N$817  (via drill 0.9)
  other vias: 87.63,35.56
N$818  (via drill 0.9)
  other vias: 87.63,33.02
N$819  (via drill 0.9)
  other vias: 87.63,30.48
N$820  (via drill 0.9)
  other vias: 87.63,27.94
N$821  (via drill 0.9)
  other vias: 87.63,25.4
N$822  (via drill 0.9)
  other vias: 87.63,22.86
N$823  (via drill 0.9)
  other vias: 90.17,22.86
N$824  (via drill 0.9)
  other vias: 90.17,25.4
N$825  (via drill 0.9)
  other vias: 90.17,27.94
N$826  (via drill 0.9)
  other vias: 90.17,30.48
N$827  (via drill 0.9)
  other vias: 90.17,33.02
N$828  (via drill 0.9)
  other vias: 90.17,35.56
N$829  (via drill 0.9)
  other vias: 90.17,38.1
N$830  (via drill 0.9)
  other vias: 90.17,40.64
N$831  (via drill 0.9)
  other vias: 90.17,43.18
N$832  (via drill 0.9)
  other vias: 90.17,45.72
N$833  (via drill 0.9)
  other vias: 90.17,48.26
N$834  (via drill 0.9)
  other vias: 90.17,50.8
N$835  (via drill 0.9)
  other vias: 90.17,53.34
N$836  (via drill 0.9)
  other vias: 90.17,55.88
N$837  (via drill 0.9)
  other vias: 90.17,58.42
N$838  (via drill 0.9)
  other vias: 90.17,60.96
N$839  (via drill 0.9)
  other vias: 90.17,63.5
N$840  (via drill 0.9)
  other vias: 87.63,63.5
N$841  (via drill 0.9)
  other vias: 92.71,22.86
N$842  (via drill 0.9)
  other vias: 92.71,25.4
N$843  (via drill 0.9)
  other vias: 92.71,27.94
N$844  (via drill 0.9)
  other vias: 92.71,30.48
N$845  (via drill 0.9)
  other vias: 92.71,33.02
N$846  (via drill 0.9)
  other vias: 92.71,35.56
N$847  (via drill 0.9)
  other vias: 92.71,38.1
N$848  (via drill 0.9)
  other vias: 92.71,40.64
N$849  (via drill 0.9)
  other vias: 92.71,45.72
N$850  (via drill 0.9)
  other vias: 92.71,48.26
N$851  (via drill 0.9)
  other vias: 92.71,50.8
N$852  (via drill 0.9)
  other vias: 92.71,53.34
N$853  (via drill 0.9)
  other vias: 92.71,55.88
N$854  (via drill 0.9)
  other vias: 92.71,58.42
N$855  (via drill 0.9)
  other vias: 92.71,60.96
N$856  (via drill 0.9)
  other vias: 92.71,63.5
N$857  (via drill 0.9)
  other vias: 67.31,71.12
N$858  (via drill 0.9)
  other vias: 67.31,68.58
N$859  (via drill 0.9)
  other vias: 69.85,68.58
N$860  (via drill 0.9)
  other vias: 69.85,71.12
N$861  (via drill 0.9)
  other vias: 72.39,71.12
N$862  (via drill 0.9)
  other vias: 72.39,68.58
N$863  (via drill 0.9)
  other vias: 67.31,66.04
N$864  (via drill 0.9)
  other vias: 69.85,66.04
N$865  (via drill 0.9)
  other vias: 72.39,66.04
N$866  (via drill 0.9)
  other vias: 74.93,66.04
N$867  (via drill 0.9)
  other vias: 74.93,68.58
N$868  (via drill 0.9)
  other vias: 74.93,71.12
N$869  (via drill 0.9)
  other vias: 74.93,73.66
N$870  (via drill 0.9)
  other vias: 72.39,73.66
N$871  (via drill 0.9)
  other vias: 69.85,73.66
N$872  (via drill 0.9)
  other vias: 67.31,73.66
N$873  (via drill 0.9)
  other vias: 77.47,71.12
N$874  (via drill 0.9)
  other vias: 77.47,68.58
N$875  (via drill 0.9)
  other vias: 77.47,66.04
N$876  (via drill 0.9)
  other vias: 80.01,66.04
N$877  (via drill 0.9)
  other vias: 80.01,68.58
N$878  (via drill 0.9)
  other vias: 80.01,71.12
N$879  (via drill 0.9)
  other vias: 80.01,73.66
N$880  (via drill 0.9)
  other vias: 77.47,73.66
N$881  (via drill 0.9)
  other vias: 82.55,71.12
N$882  (via drill 0.9)
  other vias: 82.55,68.58
N$883  (via drill 0.9)
  other vias: 82.55,66.04
N$884  (via drill 0.9)
  other vias: 85.09,66.04
N$885  (via drill 0.9)
  other vias: 85.09,68.58
N$886  (via drill 0.9)
  other vias: 85.09,71.12
N$887  (via drill 0.9)
  other vias: 85.09,73.66
N$888  (via drill 0.9)
  other vias: 82.55,73.66
N$889  (via drill 0.9)
  other vias: 87.63,71.12
N$890  (via drill 0.9)
  other vias: 87.63,68.58
N$891  (via drill 0.9)
  other vias: 87.63,66.04
N$892  (via drill 0.9)
  other vias: 90.17,66.04
N$893  (via drill 0.9)
  other vias: 90.17,68.58
N$894  (via drill 0.9)
  other vias: 90.17,71.12
N$895  (via drill 0.9)
  other vias: 90.17,73.66
N$896  (via drill 0.9)
  other vias: 87.63,73.66
N$897  (via drill 0.9)
  other vias: 92.71,66.04
N$898  (via drill 0.9)
  other vias: 92.71,68.58
N$899  (via drill 0.9)
  other vias: 92.71,71.12
N$900  (via drill 0.9)
  other vias: 92.71,73.66
N$901  (via drill 0.9)
  other vias: 67.31,17.78
N$902  (via drill 0.9)
  other vias: 67.31,15.24
N$903  (via drill 0.9)
  other vias: 69.85,15.24
N$904  (via drill 0.9)
  other vias: 69.85,17.78
N$905  (via drill 0.9)
  other vias: 72.39,17.78
N$906  (via drill 0.9)
  other vias: 72.39,15.24
N$907  (via drill 0.9)
  other vias: 67.31,12.7
N$908  (via drill 0.9)
  other vias: 69.85,12.7
N$909  (via drill 0.9)
  other vias: 72.39,12.7
N$910  (via drill 0.9)
  other vias: 74.93,12.7
N$911  (via drill 0.9)
  other vias: 74.93,15.24
N$912  (via drill 0.9)
  other vias: 74.93,17.78
N$913  (via drill 0.9)
  other vias: 74.93,20.32
N$914  (via drill 0.9)
  other vias: 72.39,20.32
N$915  (via drill 0.9)
  other vias: 69.85,20.32
N$916  (via drill 0.9)
  other vias: 67.31,20.32
N$917  (via drill 0.9)
  other vias: 77.47,17.78
N$918  (via drill 0.9)
  other vias: 77.47,15.24
N$919  (via drill 0.9)
  other vias: 77.47,12.7
N$920  (via drill 0.9)
  other vias: 80.01,12.7
N$921  (via drill 0.9)
  other vias: 80.01,15.24
N$922  (via drill 0.9)
  other vias: 80.01,17.78
N$923  (via drill 0.9)
  other vias: 80.01,20.32
N$924  (via drill 0.9)
  other vias: 77.47,20.32
N$925  (via drill 0.9)
  other vias: 82.55,17.78
N$926  (via drill 0.9)
  other vias: 82.55,15.24
N$927  (via drill 0.9)
  other vias: 82.55,12.7
N$928  (via drill 0.9)
  other vias: 85.09,12.7
N$929  (via drill 0.9)
  other vias: 85.09,15.24
N$930  (via drill 0.9)
  other vias: 85.09,17.78
N$931  (via drill 0.9)
  other vias: 85.09,20.32
N$932  (via drill 0.9)
  other vias: 82.55,20.32
N$933  (via drill 0.9)
  other vias: 87.63,17.78
N$934  (via drill 0.9)
  other vias: 87.63,15.24
N$935  (via drill 0.9)
  other vias: 87.63,12.7
N$936  (via drill 0.9)
  other vias: 90.17,12.7
N$937  (via drill 0.9)
  other vias: 90.17,15.24
N$938  (via drill 0.9)
  other vias: 90.17,17.78
N$939  (via drill 0.9)
  other vias: 90.17,20.32
N$940  (via drill 0.9)
  other vias: 87.63,20.32
N$941  (via drill 0.9)
  other vias: 92.71,12.7
N$942  (via drill 0.9)
  other vias: 92.71,15.24
N$943  (via drill 0.9)
  other vias: 92.71,17.78
N$944  (via drill 0.9)
  other vias: 92.71,20.32
N$945  (via drill 0.9)
  other vias: 67.31,7.62
N$946  (via drill 0.9)
  other vias: 67.31,5.08
N$947  (via drill 0.9)
  other vias: 69.85,5.08
N$948  (via drill 0.9)
  other vias: 69.85,7.62
N$949  (via drill 0.9)
  other vias: 72.39,7.62
N$950  (via drill 0.9)
  other vias: 72.39,5.08
N$951  (via drill 0.9)
  other vias: 67.31,2.54
N$952  (via drill 0.9)
  other vias: 69.85,2.54
N$953  (via drill 0.9)
  other vias: 72.39,2.54
N$954  (via drill 0.9)
  other vias: 74.93,2.54
N$955  (via drill 0.9)
  other vias: 74.93,5.08
N$956  (via drill 0.9)
  other vias: 74.93,7.62
N$957  (via drill 0.9)
  other vias: 74.93,10.16
N$958  (via drill 0.9)
  other vias: 72.39,10.16
N$959  (via drill 0.9)
  other vias: 69.85,10.16
N$960  (via drill 0.9)
  other vias: 67.31,10.16
N$961  (via drill 0.9)
  other vias: 77.47,7.62
N$962  (via drill 0.9)
  other vias: 77.47,5.08
N$963  (via drill 0.9)
  other vias: 77.47,2.54
N$964  (via drill 0.9)
  other vias: 80.01,2.54
N$965  (via drill 0.9)
  other vias: 80.01,5.08
N$966  (via drill 0.9)
  other vias: 80.01,7.62
N$967  (via drill 0.9)
  other vias: 80.01,10.16
N$968  (via drill 0.9)
  other vias: 77.47,10.16
N$969  (via drill 0.9)
  other vias: 82.55,7.62
N$970  (via drill 0.9)
  other vias: 82.55,5.08
N$971  (via drill 0.9)
  other vias: 82.55,2.54
N$972  (via drill 0.9)
  other vias: 85.09,2.54
N$973  (via drill 0.9)
  other vias: 85.09,5.08
N$974  (via drill 0.9)
  other vias: 85.09,7.62
N$975  (via drill 0.9)
  other vias: 85.09,10.16
N$976  (via drill 0.9)
  other vias: 82.55,10.16
N$977  (via drill 0.9)
  other vias: 87.63,7.62
N$978  (via drill 0.9)
  other vias: 87.63,5.08
N$979  (via drill 0.9)
  other vias: 87.63,2.54
N$980  (via drill 0.9)
  other vias: 90.17,2.54
N$981  (via drill 0.9)
  other vias: 90.17,5.08
N$982  (via drill 0.9)
  other vias: 90.17,7.62
N$983  (via drill 0.9)
  other vias: 90.17,10.16
N$984  (via drill 0.9)
  other vias: 87.63,10.16
N$985  (via drill 0.9)
  other vias: 92.71,2.54
N$986  (via drill 0.9)
  other vias: 92.71,5.08
N$987  (via drill 0.9)
  other vias: 92.71,7.62
N$988  (via drill 0.9)
  other vias: 92.71,10.16
N$989  (via drill 0.9)
  other vias: 67.31,81.28
N$990  (via drill 0.9)
  other vias: 67.31,78.74
N$991  (via drill 0.9)
  other vias: 69.85,78.74
N$992  (via drill 0.9)
  other vias: 69.85,81.28
N$993  (via drill 0.9)
  other vias: 72.39,81.28
N$994  (via drill 0.9)
  other vias: 72.39,78.74
N$995  (via drill 0.9)
  other vias: 67.31,76.2
N$996  (via drill 0.9)